# Altium PCB SJA1105Q_LAN8870_EVB_revA.PcbDoc (part 5 of 5)
Units mm, origin at the board's own origin, x right, y up, seen from the top; angles counter-clockwise.
Board outline 128 x 110 mm, 6 copper layers (Top Layer, Mid Layer 1, Mid Layer 2, Mid Layer 3, Mid Layer 4, Bottom Layer), stack 1.538 mm thick; 490 components, 327 nets, 1659 pads, 519 vias.
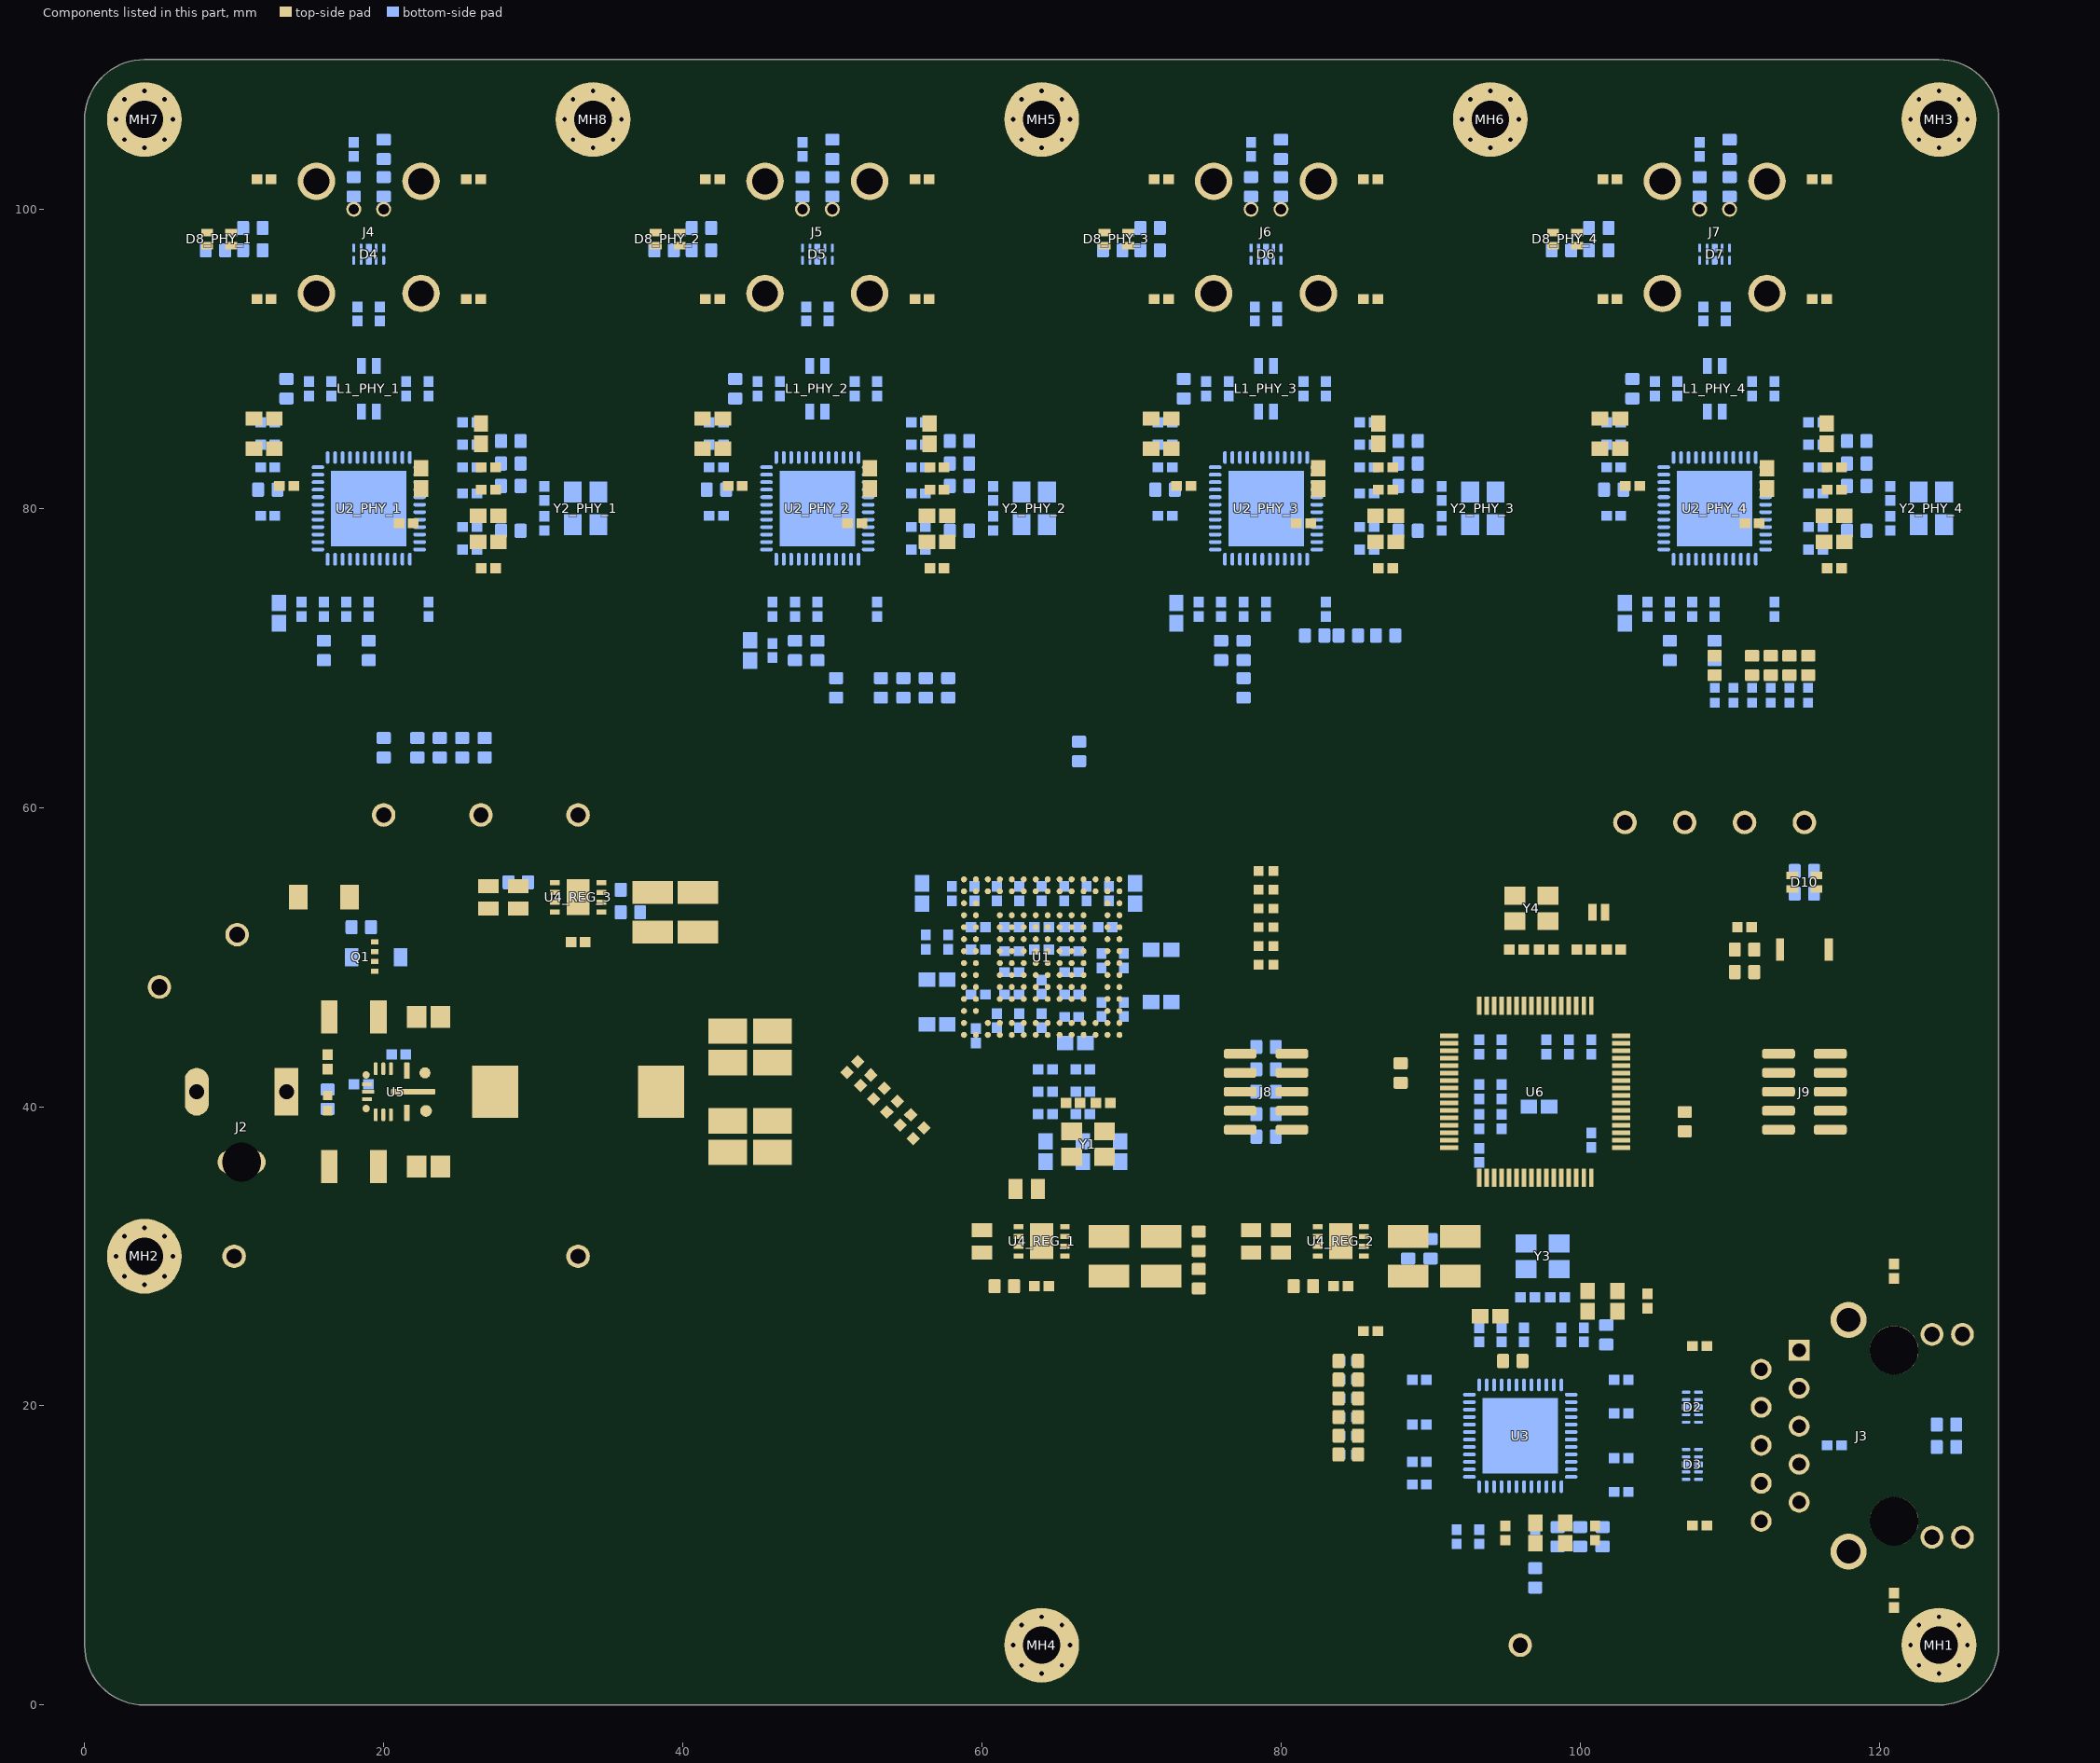
[diagram p9: the components of this part, seen from the top]

## Polygon pours and split planes (outlines as drawn) (continued)
SW_VDDIO_MII2 on Bottom Layer "SW_VDDIO_MII2_L06_P188" (solid, remove dead copper, pour order 188): 61.75,54.25 55.25,54.25 55.25,52.5 59.75,52.5 59.75,51.25 60.75,51.25 60.75,53.25 61.75,53.25
SW_VDD_CORE on Bottom Layer "SW_VDD_CORE_L06_P175" (solid, remove dead copper, pour order 175): 62,48.5 62,52.5 63.25,52.5 63.25,54.25 61.75,54.25 61.75,53.25 60.75,53.25 60.75,48.5
VDDIO_8830 on Bottom Layer "VDDIO_8830_L06_P160" (solid, remove dead copper, pour order 160): 93.5,15 93.5,14 92.5,13 92.5,11.25 91,11.25 91,13 93,15
NetC102_1 on Bottom Layer "NETC102_1_L06_P167" (solid, remove dead copper, pour order 167): 89.25,15.5 91,15.5 92,16.5 93,16.5 93,16 92.5,16 90.5,14 89.25,14
3V3 on Bottom Layer "3V3_L06_P057" (solid, remove dead copper, pour order 57): 57,49.25 57,44.75 53.25,44.75 53.25,49.25
SW_VDDIO_MII3 on Bottom Layer "SW_VDDIO_MII3_L06_P173" (solid, remove dead copper, pour order 173): 67,53 67,52.75 71,52.75 71,54.25 63.25,54.25 63.25,53
3V3 on Bottom Layer "3V3_L06_P058" (solid, remove dead copper, pour order 58): 71,54.25 69.5,54.25 69.5,57 71,57
NetC72_PHY_4_1 on Bottom Layer "NETC72_PHY_4_1_L06_P083" (solid, remove dead copper, pour order 83): 115.75,78 114.75,78 114.25,78.5 112,78.5 112,78 112.75,78 114.25,76.5 115.75,76.5
SW_VDD_CORE on Bottom Layer "SW_VDD_CORE_L06_P228" (solid, remove dead copper, pour order 228): 72,37 72,39 68.25,39 68.25,37
1V2 on Bottom Layer "1V2_L06_P211" (solid, remove dead copper, pour order 211): 63.25,33.25 66,30.5 73.25,30.5 73.25,37 63.25,37
SW_VDDA_OSC on Bottom Layer "SW_VDDA_OSC_L06_P227" (solid, remove dead copper, pour order 227): 65.5,43 66.75,43 66.75,39 67.5,39 67.5,37 65.5,37
SW_VDDA_PLL on Bottom Layer "SW_VDDA_PLL_L06_P222" (solid, remove dead copper, pour order 222): 64.25,43 65.5,43 65.5,37 63.5,37 63.5,39 64.25,39
VDDIO_8830 on Bottom Layer "VDDIO_8830_L06_P168" (solid, remove dead copper, pour order 168): 93,20 91.75,20 91,20.75 89.25,20.75 89.25,22.5 90.25,22.5 92.25,20.5 93,20.5
NetC102_1 on Bottom Layer "NETC102_1_L06_P159" (solid, remove dead copper, pour order 159): 94,15 94,11.25 92.5,11.25 92.5,13 93.5,14 93.5,15
NetC72_PHY_1_1 on Bottom Layer "NETC72_PHY_1_1_L06_P080" (solid, remove dead copper, pour order 80): 25.75,78 24.75,78 24.25,78.5 22,78.5 22,78 22.75,78 24.25,76.5 25.75,76.5
NetC80_PHY_1_1 on Bottom Layer "NETC80_PHY_1_1_L06_P064" (solid, remove dead copper, pour order 64): 15.25,74.5 12.5,74.5 12.5,73.25 16.75,73.25 16.75,74 17.5,74.75 17.5,75.75 17.75,76 17.75,77 17,77 17,76.25
NetC72_PHY_1_1 on Bottom Layer "NETC72_PHY_1_1_L06_P120" (solid, remove dead copper, pour order 120): 16,79.75 14.75,79.75 14.25,80.25 12.25,80.25 12.25,78.75 16,78.75
3V3 on Bottom Layer "3V3_L06_P210" (solid, remove dead copper, pour order 210): 101.25,44 101.25,45.25 97.25,45.25 97.25,44
3V3 on Bottom Layer "3V3_L06_P207" (solid, remove dead copper, pour order 207): 92.75,44 95.25,44 95.25,45.25 92.75,45.25
STM32_VDDA on Bottom Layer "STM32_VDDA_L06_P206" (solid, remove dead copper, pour order 206): 92.75,41 97.25,41 97.25,39 92.75,39
SW_VDDIO_CLO on Bottom Layer "SW_VDDIO_CLO_L06_P189" (solid, remove dead copper, pour order 189): 72,47.75 67.25,47.75 67.25,46.5 72,46.5
NetC80_PHY_4_1 on Bottom Layer "NETC80_PHY_4_1_L06_P067" (solid, remove dead copper, pour order 67): 105.25,74.5 102.5,74.5 102.5,73.25 106.75,73.25 106.75,74 107.5,74.75 107.5,75.75 107.75,76 107.75,77 107,77 107,76.25
NetC72_PHY_3_1 on Bottom Layer "NETC72_PHY_3_1_L06_P150" (solid, remove dead copper, pour order 150): 76,79.75 74.75,79.75 74.25,80.25 72.25,80.25 72.25,78.75 76,78.75
NetC80_PHY_3_1 on Bottom Layer "NETC80_PHY_3_1_L06_P066" (solid, remove dead copper, pour order 66): 75.25,74.5 72.5,74.5 72.5,73.25 76.75,73.25 76.75,74 77.5,74.75 77.5,75.75 77.75,76 77.75,77 77,77 77,76.25
LAN8870_VDDIO_PHY_3 on Bottom Layer "LAN8870_VDDIO_PHY_3_L06_P062" (solid, remove dead copper, pour order 62): 77.5,75.75 77.75,76 77.75,77 78.5,77 78.5,75.75 78.25,75.5 78.25,73.25 76.75,73.25 76.75,74 77.5,74.75
NetC72_PHY_2_1 on Bottom Layer "NETC72_PHY_2_1_L06_P149" (solid, remove dead copper, pour order 149): 46,79.75 44.75,79.75 44.25,80.25 42.25,80.25 42.25,78.75 46,78.75
NetC72_PHY_2_1 on Bottom Layer "NETC72_PHY_2_1_L06_P081" (solid, remove dead copper, pour order 81): 55.75,78 54.75,78 54.25,78.5 52,78.5 52,78 52.75,78 54.25,76.5 55.75,76.5
SW_VDDIO_MII1 on Bottom Layer "SW_VDDIO_MII1_L06_P187" (solid, remove dead copper, pour order 187): 55.5,49.25 57,49.25 57,47.75 58.5,47.75 58.5,48 59.75,48 59.75,46.75 60.75,46.75 60.75,51.25 59.75,51.25 59.75,50 58.5,50 58.5,51 55.5,51
SW_VDD_CORE on Bottom Layer "SW_VDD_CORE_L06_P183" (solid, remove dead copper, pour order 183): 66.25,47 65,47 65,48.75 66,48.75 66,49.75 67.25,49.75 67.25,47.75 66.25,47.75
SW_VDDIO_MII4 on Bottom Layer "SW_VDDIO_MII4_L06_P179" (solid, remove dead copper, pour order 179): 68.25,51.5 72,51.5 72,49.75 67.25,49.75 66,49.75 66,51 67,51 67,52.75 68.25,52.75
SW_VDD_CORE on Bottom Layer "SW_VDD_CORE_L06_P178" (solid, remove dead copper, pour order 178): 65.5,53 67,53 67,51 66,51 66,52.25 65.5,52.25
SW_VDD_CORE on Bottom Layer "SW_VDD_CORE_L06_P176" (solid, remove dead copper, pour order 176): 64,49.75 64,53 65.5,53 65.5,52.25 65.25,52.25 65.25,49.75
SW_VDDIO_HOST on Bottom Layer "SW_VDDIO_HOST_L06_P172" (solid, remove dead copper, pour order 172): 64.25,45.75 64.5,45.75 64.5,43.5 66.25,43.5 66.25,45.5 66,45.5 66,47.25 65.25,47.25 65.25,48 63.25,48 63.25,46.75 64.25,46.75
SW_VDDIO_MII0 on Bottom Layer "SW_VDDIO_MII0_L06_P171" (solid, remove dead copper, pour order 171): 59,46.75 57,46.75 57,44.75 60.25,44.75 60.25,45.75 64.25,45.75 64.25,46.75
NetC109_1 on Bottom Layer "NETC109_1_L06_P155" (solid, remove dead copper, pour order 155): 99,20.5 100.75,20.5 101.25,21 102.75,21 102.75,22.5 100.5,22.5 99,21
NetC112_1 on Bottom Layer "NETC112_1_L06_P153" (solid, remove dead copper, pour order 153): 99,19.75 100.5,19.75 101.25,20.5 102.75,20.5 102.75,18.75 99,18.75
NetC109_1 on Bottom Layer "NETC109_1_L06_P154" (solid, remove dead copper, pour order 154): 99,15.5 100.75,15.5 101.25,15 102.75,15 102.75,13.5 100.5,13.5 99,15
NetC112_1 on Bottom Layer "NETC112_1_L06_P152" (solid, remove dead copper, pour order 152): 99,16.25 100.5,16.25 101.25,15.5 102.75,15.5 102.75,17.25 99,17.25
NetC107_1 on Bottom Layer "NETC107_1_L06_P156" (solid, remove dead copper, pour order 156): 98.75,21 98.75,21.5 101,23.75 101,24.75 98,24.75 98,21
VDDIO_8830 on Bottom Layer "VDDIO_8830_L06_P170" (solid, remove dead copper, pour order 170): 96.25,15 96.25,11.25 97.75,11.25 97.75,13.25 97,14 97,15
NetC102_1 on Bottom Layer "NETC102_1_L06_P161" (solid, remove dead copper, pour order 161): 93,18 89.25,18 89.25,19.5 91,19.5 92,18.5 93,18.5
VDDIO_8830 on Bottom Layer "VDDIO_8830_L06_P162" (solid, remove dead copper, pour order 162): 93,17 89.25,17 89.25,15.5 91,15.5 92,16.5 93,16.5
NetC102_1 on Bottom Layer "NETC102_1_L06_P158" (solid, remove dead copper, pour order 158): 95,21 94.5,21 94.5,21.75 92.75,23.5 92.75,24.75 94,24.75 94,23.5 95,22.5
VDDIO_8830 on Bottom Layer "VDDIO_8830_L06_P157" (solid, remove dead copper, pour order 157): 95.5,21 95.5,24.75 94,24.75 94,23.5 95,22.5 95,21
LAN8870_VDDIO_PHY_4 on Bottom Layer "LAN8870_VDDIO_PHY_4_L06_P063" (solid, remove dead copper, pour order 63): 107.5,75.75 107.75,76 107.75,77 108.5,77 108.5,75.75 108.25,75.5 108.25,73.25 106.75,73.25 106.75,74 107.5,74.75
NetC72_PHY_4_1 on Bottom Layer "NETC72_PHY_4_1_L06_P071" (solid, remove dead copper, pour order 71): 108.25,75.5 108.5,75.75 108.5,77 109,77 109,76.25 109.25,76 109.25,75 109.75,74.5 109.75,73.25 108.25,73.25
LAN8870_VDDIO_PHY_4 on Bottom Layer "LAN8870_VDDIO_PHY_4_L06_P075" (solid, remove dead copper, pour order 75): 113.75,75.25 112,77 111.5,77 111.5,76 112.25,75.25 112.25,73.25 113.75,73.25
NetC70_PHY_4_1 on Bottom Layer "NETC70_PHY_4_1_L06_P079" (solid, remove dead copper, pour order 79): 112,79 112.5,79 113,79.5 115.75,79.5 115.75,78 114.75,78 114.25,78.5 112,78.5
NetC76_PHY_4_1 on Bottom Layer "NETC76_PHY_4_1_L06_P087" (solid, remove dead copper, pour order 87): 112,81 112.75,81 113.5,81.75 115.75,81.75 115.75,80.25 112,80.25
LAN8870_VBAT_PHY_4 on Bottom Layer "LAN8870_VBAT_PHY_4_L06_P091" (solid, remove dead copper, pour order 91): 112,82.75 112.75,83.5 115.75,83.5 115.75,82 112,82
LAN8870_VDDA_PHY_4 on Bottom Layer "LAN8870_VDDA_PHY_4_L06_P095" (solid, remove dead copper, pour order 95): 112.25,83 112.75,83.5 115.75,83.5 115.75,85 112.5,85 111.5,84 111.5,83
NetC76_PHY_4_1 on Bottom Layer "NETC76_PHY_4_1_L06_P099" (solid, remove dead copper, pour order 99): 113.25,86 113.75,86.5 115.75,86.5 115.75,85 112.5,85 111,83.5 111,83 110.5,83 110.5,84 112.5,86
LAN8870_VDDA_PHY_4 on Bottom Layer "LAN8870_VDDA_PHY_4_L06_P103" (solid, remove dead copper, pour order 103): 113.75,86.5 113.25,86 112.5,86 110.5,84 110.5,83 110,83 110,84.5 112.25,86.75 112.25,88 113.75,88
NetC76_PHY_4_1 on Bottom Layer "NETC76_PHY_4_1_L06_P107" (solid, remove dead copper, pour order 107): 110,83 110,84.5 112.25,86.75 112.25,88 110.75,88 110.75,86.25 109.5,85 109.5,83
LAN8870_VDDA_PHY_4 on Bottom Layer "LAN8870_VDDA_PHY_4_L06_P111" (solid, remove dead copper, pour order 111): 106,83.5 102.25,83.5 102.25,86.5 104,86.5 106.5,84 106.5,83 106,83
LAN8870_VDDIO_PHY_4 on Bottom Layer "LAN8870_VDDIO_PHY_4_L06_P115" (solid, remove dead copper, pour order 115): 102.25,83.5 106,83.5 106,82 102.25,82
LAN8870_VDDA_PHY_4 on Bottom Layer "LAN8870_VDDA_PHY_4_L06_P119" (solid, remove dead copper, pour order 119): 108,83 108,84 105.75,86.25 105.75,88 107.25,88 107.25,86.25 108.5,85 108.5,83
NetC72_PHY_4_1 on Bottom Layer "NETC72_PHY_4_1_L06_P151" (solid, remove dead copper, pour order 151): 106,79.75 104.75,79.75 104.25,80.25 102.25,80.25 102.25,78.75 106,78.75
LAN8870_VDDIO_PHY_2 on Bottom Layer "LAN8870_VDDIO_PHY_2_L06_P061" (solid, remove dead copper, pour order 61): 47.5,75.75 47.75,76 47.75,77 48.5,77 48.5,75.75 48.25,75.5 48.25,73.25 46.75,73.25 46.75,74 47.5,74.75
LAN8870_VDDIO_PHY_1 on Bottom Layer "LAN8870_VDDIO_PHY_1_L06_P060" (solid, remove dead copper, pour order 60): 17.5,75.75 17.75,76 17.75,77 18.5,77 18.5,75.75 18.25,75.5 18.25,73.25 16.75,73.25 16.75,74 17.5,74.75
NetC80_PHY_2_1 on Bottom Layer "NETC80_PHY_2_1_L06_P065" (solid, remove dead copper, pour order 65): 43.75,73 43.75,70.5 46.75,70.5 46.75,74 47.5,74.75 47.5,75.75 47.75,76 47.75,77 47,77 47,76.25
NetC72_PHY_3_1 on Bottom Layer "NETC72_PHY_3_1_L06_P070" (solid, remove dead copper, pour order 70): 78.25,75.5 78.5,75.75 78.5,77 79,77 79,76.25 79.25,76 79.25,75 79.75,74.5 79.75,73.25 78.25,73.25
NetC72_PHY_2_1 on Bottom Layer "NETC72_PHY_2_1_L06_P069" (solid, remove dead copper, pour order 69): 48.25,75.5 48.5,75.75 48.5,77 49,77 49,76.25 49.25,76 49.25,75 49.75,74.5 49.75,73.25 48.25,73.25
NetC72_PHY_1_1 on Bottom Layer "NETC72_PHY_1_1_L06_P068" (solid, remove dead copper, pour order 68): 18.25,75.5 18.5,75.75 18.5,77 19,77 19,76.25 19.25,76 19.25,75 19.75,74.5 19.75,73.25 18.25,73.25
LAN8870_VDDIO_PHY_3 on Bottom Layer "LAN8870_VDDIO_PHY_3_L06_P074" (solid, remove dead copper, pour order 74): 83.75,75.25 82,77 81.5,77 81.5,76 82.25,75.25 82.25,73.25 83.75,73.25
LAN8870_VDDIO_PHY_2 on Bottom Layer "LAN8870_VDDIO_PHY_2_L06_P073" (solid, remove dead copper, pour order 73): 53.75,75.25 52,77 51.5,77 51.5,76 52.25,75.25 52.25,73.25 53.75,73.25
LAN8870_VDDIO_PHY_1 on Bottom Layer "LAN8870_VDDIO_PHY_1_L06_P072" (solid, remove dead copper, pour order 72): 23.75,75.25 22,77 21.5,77 21.5,76 22.25,75.25 22.25,73.25 23.75,73.25
NetC70_PHY_3_1 on Bottom Layer "NETC70_PHY_3_1_L06_P078" (solid, remove dead copper, pour order 78): 82,79 82.5,79 83,79.5 85.75,79.5 85.75,78 84.75,78 84.25,78.5 82,78.5
NetC70_PHY_2_1 on Bottom Layer "NETC70_PHY_2_1_L06_P077" (solid, remove dead copper, pour order 77): 52,79 52.5,79 53,79.5 55.75,79.5 55.75,78 54.75,78 54.25,78.5 52,78.5
NetC70_PHY_1_1 on Bottom Layer "NETC70_PHY_1_1_L06_P076" (solid, remove dead copper, pour order 76): 22,79 22.5,79 23,79.5 25.75,79.5 25.75,78 24.75,78 24.25,78.5 22,78.5
NetC72_PHY_3_1 on Bottom Layer "NETC72_PHY_3_1_L06_P082" (solid, remove dead copper, pour order 82): 85.75,78 84.75,78 84.25,78.5 82,78.5 82,78 82.75,78 84.25,76.5 85.75,76.5
NetC76_PHY_3_1 on Bottom Layer "NETC76_PHY_3_1_L06_P086" (solid, remove dead copper, pour order 86): 82,81 82.75,81 83.5,81.75 85.75,81.75 85.75,80.25 82,80.25
NetC76_PHY_2_1 on Bottom Layer "NETC76_PHY_2_1_L06_P085" (solid, remove dead copper, pour order 85): 52,81 52.75,81 53.5,81.75 55.75,81.75 55.75,80.25 52,80.25
NetC76_PHY_1_1 on Bottom Layer "NETC76_PHY_1_1_L06_P084" (solid, remove dead copper, pour order 84): 22,81 22.75,81 23.5,81.75 25.75,81.75 25.75,80.25 22,80.25
LAN8870_VBAT_PHY_3 on Bottom Layer "LAN8870_VBAT_PHY_3_L06_P090" (solid, remove dead copper, pour order 90): 82,82.75 82.75,83.5 85.75,83.5 85.75,82 82,82
LAN8870_VBAT_PHY_2 on Bottom Layer "LAN8870_VBAT_PHY_2_L06_P089" (solid, remove dead copper, pour order 89): 52,82.75 52.75,83.5 55.75,83.5 55.75,82 52,82
LAN8870_VBAT_PHY_1 on Bottom Layer "LAN8870_VBAT_PHY_1_L06_P088" (solid, remove dead copper, pour order 88): 22,82.75 22.75,83.5 25.75,83.5 25.75,82 22,82
LAN8870_VDDA_PHY_3 on Bottom Layer "LAN8870_VDDA_PHY_3_L06_P094" (solid, remove dead copper, pour order 94): 82.25,83 82.75,83.5 85.75,83.5 85.75,85 82.5,85 81.5,84 81.5,83
LAN8870_VDDA_PHY_2 on Bottom Layer "LAN8870_VDDA_PHY_2_L06_P093" (solid, remove dead copper, pour order 93): 52.25,83 52.75,83.5 55.75,83.5 55.75,85 52.5,85 51.5,84 51.5,83
LAN8870_VDDA_PHY_1 on Bottom Layer "LAN8870_VDDA_PHY_1_L06_P092" (solid, remove dead copper, pour order 92): 22.25,83 22.75,83.5 25.75,83.5 25.75,85 22.5,85 21.5,84 21.5,83
NetC76_PHY_3_1 on Bottom Layer "NETC76_PHY_3_1_L06_P098" (solid, remove dead copper, pour order 98): 83.25,86 83.75,86.5 85.75,86.5 85.75,85 82.5,85 81,83.5 81,83 80.5,83 80.5,84 82.5,86
NetC76_PHY_2_1 on Bottom Layer "NETC76_PHY_2_1_L06_P097" (solid, remove dead copper, pour order 97): 53.25,86 53.75,86.5 55.75,86.5 55.75,85 52.5,85 51,83.5 51,83 50.5,83 50.5,84 52.5,86
NetC76_PHY_1_1 on Bottom Layer "NETC76_PHY_1_1_L06_P096" (solid, remove dead copper, pour order 96): 23.25,86 23.75,86.5 25.75,86.5 25.75,85 22.5,85 21,83.5 21,83 20.5,83 20.5,84 22.5,86
LAN8870_VDDA_PHY_3 on Bottom Layer "LAN8870_VDDA_PHY_3_L06_P102" (solid, remove dead copper, pour order 102): 83.75,86.5 83.25,86 82.5,86 80.5,84 80.5,83 80,83 80,84.5 82.25,86.75 82.25,88 83.75,88
LAN8870_VDDA_PHY_2 on Bottom Layer "LAN8870_VDDA_PHY_2_L06_P101" (solid, remove dead copper, pour order 101): 53.75,86.5 53.25,86 52.5,86 50.5,84 50.5,83 50,83 50,84.5 52.25,86.75 52.25,88 53.75,88
LAN8870_VDDA_PHY_1 on Bottom Layer "LAN8870_VDDA_PHY_1_L06_P100" (solid, remove dead copper, pour order 100): 23.75,86.5 23.25,86 22.5,86 20.5,84 20.5,83 20,83 20,84.5 22.25,86.75 22.25,88 23.75,88
NetC76_PHY_3_1 on Bottom Layer "NETC76_PHY_3_1_L06_P106" (solid, remove dead copper, pour order 106): 80,83 80,84.5 82.25,86.75 82.25,88 80.75,88 80.75,86.25 79.5,85 79.5,83
NetC76_PHY_2_1 on Bottom Layer "NETC76_PHY_2_1_L06_P105" (solid, remove dead copper, pour order 105): 50,83 50,84.5 52.25,86.75 52.25,88 50.75,88 50.75,86.25 49.5,85 49.5,83
NetC76_PHY_1_1 on Bottom Layer "NETC76_PHY_1_1_L06_P104" (solid, remove dead copper, pour order 104): 20,83 20,84.5 22.25,86.75 22.25,88 20.75,88 20.75,86.25 19.5,85 19.5,83
LAN8870_VDDA_PHY_3 on Bottom Layer "LAN8870_VDDA_PHY_3_L06_P110" (solid, remove dead copper, pour order 110): 76,83.5 72.25,83.5 72.25,86.5 74,86.5 76.5,84 76.5,83 76,83
LAN8870_VDDA_PHY_2 on Bottom Layer "LAN8870_VDDA_PHY_2_L06_P109" (solid, remove dead copper, pour order 109): 46,83.5 42.25,83.5 42.25,86.5 44,86.5 46.5,84 46.5,83 46,83
LAN8870_VDDA_PHY_1 on Bottom Layer "LAN8870_VDDA_PHY_1_L06_P108" (solid, remove dead copper, pour order 108): 16,83.5 12.25,83.5 12.25,86.5 14,86.5 16.5,84 16.5,83 16,83
LAN8870_VDDIO_PHY_3 on Bottom Layer "LAN8870_VDDIO_PHY_3_L06_P114" (solid, remove dead copper, pour order 114): 72.25,83.5 76,83.5 76,82 72.25,82
LAN8870_VDDIO_PHY_2 on Bottom Layer "LAN8870_VDDIO_PHY_2_L06_P113" (solid, remove dead copper, pour order 113): 42.25,83.5 46,83.5 46,82 42.25,82
LAN8870_VDDIO_PHY_1 on Bottom Layer "LAN8870_VDDIO_PHY_1_L06_P112" (solid, remove dead copper, pour order 112): 12.25,83.5 16,83.5 16,82 12.25,82
LAN8870_VDDA_PHY_3 on Bottom Layer "LAN8870_VDDA_PHY_3_L06_P118" (solid, remove dead copper, pour order 118): 78,83 78,84 75.75,86.25 75.75,88 77.25,88 77.25,86.25 78.5,85 78.5,83
LAN8870_VDDA_PHY_2 on Bottom Layer "LAN8870_VDDA_PHY_2_L06_P117" (solid, remove dead copper, pour order 117): 48,83 48,84 45.75,86.25 45.75,88 47.25,88 47.25,86.25 48.5,85 48.5,83
LAN8870_VDDA_PHY_1 on Bottom Layer "LAN8870_VDDA_PHY_1_L06_P116" (solid, remove dead copper, pour order 116): 18,83 18,84 15.75,86.25 15.75,88 17.25,88 17.25,86.25 18.5,85 18.5,83
GND on Top Layer "GND_L01_P242" (solid, remove dead copper, pour order 242): 0,4 0,106 cw(c4,106) 4,110 124,110 cw(c124,106) 128,106 128,4 cw(c124,4) 124,0 4,0 cw(c4,4)
3V3 on Top Layer "3V3_L01_P239" (solid, remove dead copper, pour order 239): 83,31 77,31 77,33.5 83,33.5
8830_1V1 on Top Layer "8830_1V1_L01_P237" (solid, remove dead copper, pour order 237): 85,31.5 85.75,31.5 87.75,29.5 94,29.5 94,33.5 85,33.5
NetC102_1 on Top Layer "NETC102_1_L01_P186" (solid, remove dead copper, pour order 186): 94,23.5 94,27 86,27 86,9.5 94,9.5 94,12.5 92.5,12.5 92.5,11.5 91,11.5 91,15.5 89.5,15.5 89.5,18 90.5,18 90.5,19.5 89.5,19.5 89.5,23.5
1V2 on Top Layer "1V2_L01_P238" (solid, remove dead copper, pour order 238): 65,31.5 66,31.5 67,30.5 75,30.5 75,33.5 65,33.5
3V3 on Top Layer "3V3_L01_P214" (solid, remove dead copper, pour order 214): 58.5,33.5 60.5,35.5 63,35.5 63,31 58.5,31
8830_1V1 on Top Layer "8830_1V1_L01_P204" (solid, remove dead copper, pour order 204): 94,24.5 99.5,24.5 99.5,27 103.5,27 103.5,33.5 94,33.5
RJ45_GND on Top Layer "RJ45_GND_L01_P121" (solid, remove dead copper, pour order 121): 128,8 109,8 109,28 128,28
P4_GND on Top Layer "P4_GND_L01_P124" (solid, remove dead copper, pour order 124): 103,110 103,92 115,92 115,110
P3_GND on Top Layer "P3_GND_L01_P123" (solid, remove dead copper, pour order 123): 73,110 73,92 85,92 85,110
P2_GND on Top Layer "P2_GND_L01_P122" (solid, remove dead copper, pour order 122): 43,110 43,92 55,92 55,110
P1_GND on Top Layer "P1_GND_L01_P125" (solid, remove dead copper, pour order 125): 13,110 13,92 25,92 25,110
3V3 on Top Layer "3V3_L01_P126" (solid, remove dead copper, pour order 126): 99.75,11.5 99.75,9 97.75,9 97.75,10 96.25,10 96.25,11.5
3V3 on Top Layer "3V3_L01_P235" (solid, remove dead copper, pour order 235): 115.5,85 115.5,87.5 102,87.5 102,83.25 99,83.25 99,89.5 117.5,89.5 117.5,85
3V3 on Top Layer "3V3_L01_P234" (solid, remove dead copper, pour order 234): 85.5,85 85.5,87.5 72,87.5 72,83.25 69,83.25 69,89.5 87.5,89.5 87.5,85
3V3 on Top Layer "3V3_L01_P127" (solid, remove dead copper, pour order 127): 55.5,85 55.5,87.5 42,87.5 42,83.25 39,83.25 39,89.5 57.5,89.5 57.5,85
3V3 on Top Layer "3V3_L01_P209" (solid, remove dead copper, pour order 209): 32,54 26,54 26,55.5 32,55.5
VCC on Top Layer "VCC_L01_P230" (solid, remove dead copper, pour order 230): 20.25,40.25 20.25,38.75 19,38.75 19,34.75 23,34.75 23,38.75 22.25,38.75 22.25,40.25
LM61495Q3_VCC on Top Layer "LM61495Q3_VCC_L01_P233" (solid, remove dead copper, pour order 233): 19.25,40.75 18.25,40.75 17.75,41.25 17.75,41.75 19.25,41.75 19.25,43 15.75,43 15.75,40.25 19.25,40.25
VCC on Top Layer "VCC_L01_P232" (solid, remove dead copper, pour order 232): 20.75,41.75 20.75,43.25 19,43.25 19,50.75 23,50.75 23,43.25 22.25,43.25 22.25,41.75
SW_VDDA_OSC on Top Layer "SW_VDDA_OSC_L01_P226" (solid, remove dead copper, pour order 226): 65.5,45.25 66.25,45.25 66.5,45 66.5,42.25 65.5,42.25
SW_VDDA_PLL on Top Layer "SW_VDDA_PLL_L01_P225" (solid, remove dead copper, pour order 225): 65.5,45.25 64.75,45.25 64.75,44.75 64.5,44.5 64.5,42.25 65.5,42.25
8870_1V1 on Top Layer "8870_1V1_L01_P224" (solid, remove dead copper, pour order 224): 117,80.5 117,76.75 119.5,76.75 119.5,80.5
8870_1V1 on Top Layer "8870_1V1_L01_P219" (solid, remove dead copper, pour order 219): 87,80.5 87,76.75 89.5,76.75 89.5,80.5
8870_1V1 on Top Layer "8870_1V1_L01_P216" (solid, remove dead copper, pour order 216): 57,80.5 57,76.75 59.5,76.75 59.5,80.5
8870_1V1 on Top Layer "8870_1V1_L01_P213" (solid, remove dead copper, pour order 213): 27,80.5 27,76.75 29.5,76.75 29.5,80.5
8870_1V1 on Top Layer "8870_1V1_L01_P212" (solid, remove dead copper, pour order 212): 34,54.5 35,54.5 36.5,53 42.5,53 42.5,55.5 34,55.5
NetC107_1 on Top Layer "NETC107_1_L01_P208" (solid, remove dead copper, pour order 208): 101.5,27 99.5,27 99.5,22.5 101.5,22.5
NetC120_2 on Top Layer "NETC120_2_L01_P202" (solid, remove dead copper, pour order 202): 20.5,41.75 20.5,40.25 23.5,40.25 23.5,39 29.25,39 29.25,43 23.5,43 23.5,41.75
3V3 on Top Layer "3V3_L01_P201" (solid, remove dead copper, pour order 201): 47.5,44 36.75,44 36.75,38 47.5,38
NetF1_2 on Top Layer "NETF1_2_L01_P200" (solid, remove dead copper, pour order 200): 15,55.25 19,55.25 19,48.25 15,48.25
NetF1_1 on Top Layer "NETF1_1_L01_P199" (solid, remove dead copper, pour order 199): 15,55.25 15,39.25 9,39.25 9,55.25
NetC72_PHY_1_1 on Top Layer "NETC72_PHY_1_1_L01_P140" (solid, remove dead copper, pour order 140): 18.75,73.5 16.75,75.5 12.5,75.5 12.5,79.75 16.5,79.75 16.5,77.5 21.5,77.5 21.5,78.25 27,78.25 27,75.5 21.25,75.5 19.25,73.5
3V3 on Top Layer "3V3_L01_P198" (solid, remove dead copper, pour order 198): 100.5,34.5 100.5,37.5 101,37.5 101,34.5
3V3 on Top Layer "3V3_L01_P197" (solid, remove dead copper, pour order 197): 90.5,37.5 93.75,37.5 93.75,37 90.5,37
3V3 on Top Layer "3V3_L01_P196" (solid, remove dead copper, pour order 196): 100.5,47.5 100.5,46 99,46 99,44.5 103.5,44.5 103.5,45 101,47.5
3V3 on Top Layer "3V3_L01_P195" (solid, remove dead copper, pour order 195): 93.5,47.5 93.5,44.5 93,44.5 93,47.5
STM32_VDDA on Top Layer "STM32_VDDA_L01_P194" (solid, remove dead copper, pour order 194): 90.5,39.5 92,39.5 92,41 93.75,41 93.75,39 92.75,39 92.75,38.5 90.5,38.5
LAN8870_VDDIO_PHY_3 on Top Layer "LAN8870_VDDIO_PHY_3_L01_P148" (solid, remove dead copper, pour order 148): 72,83.25 72,84.75 73.5,84.75 73.5,79.75 72.5,79.75 72.5,75.5 76.75,75.5 78.75,73.5 79.25,73.5 81.25,75.5 83.5,75.5 83.5,73.75 81,71.25 77,71.25 75.25,73 70.5,73 70.5,83.25
NetC72_PHY_3_1 on Top Layer "NETC72_PHY_3_1_L01_P142" (solid, remove dead copper, pour order 142): 78.75,73.5 76.75,75.5 72.5,75.5 72.5,79.75 76.5,79.75 76.5,77.5 81.5,77.5 81.5,78.25 87,78.25 87,75.5 81.25,75.5 79.25,73.5
SW_VDDIO_MII4 on Top Layer "SW_VDDIO_MII4_L01_P193" (solid, remove dead copper, pour order 193): 66.5,53 66.5,51.75 67.75,51.75 67.75,52.25 67,53
SW_VDDIO_MII2 on Top Layer "SW_VDDIO_MII2_L01_P192" (solid, remove dead copper, pour order 192): 61.5,52.5 62.25,52.5 62.25,53.75 60.75,53.75 60.25,53.25 60.25,51.75 61.5,51.75
NetC112_1 on Top Layer "NETC112_1_L01_P191" (solid, remove dead copper, pour order 191): 102.5,21 102.5,22.5 101.5,22.5 101.5,27 105.5,27 105.5,15 101.5,15 101.5,21
NetC109_1 on Top Layer "NETC109_1_L01_P190" (solid, remove dead copper, pour order 190): 102.5,11.5 98.5,11.5 98.5,22.5 102.5,22.5 102.5,21 101.5,21 101.5,15 102.5,15
VDDIO_8830 on Top Layer "VDDIO_8830_L01_P185" (solid, remove dead copper, pour order 185): 89.5,19.5 90.5,19.5 90.5,18 89.5,18 89.5,15.5 91,15.5 91,11.5 92.5,11.5 92.5,12.5 94,12.5 94,11.5 97.75,11.5 97.75,15.5 93.5,15.5 93.5,20.5 95.5,20.5 95.5,24.5 94,24.5 94,23.5 89.5,23.5
LAN8870_VDDA_PHY_4 on Top Layer "LAN8870_VDDA_PHY_4_L01_P131" (solid, remove dead copper, pour order 131): 103.5,83.5 103.5,84.75 102,84.75 102,87.5 111,87.5 111,85.5 113.5,85.5 113.5,82 111.5,82 111.5,83.5
NetC76_PHY_4_1 on Top Layer "NETC76_PHY_4_1_L01_P135" (solid, remove dead copper, pour order 135): 117,78.25 115.5,78.25 115.5,80.5 113.5,80.5 113.5,85.5 111,85.5 111,87.5 115.5,87.5 115.5,83.25 114.75,83.25 114.75,82.25 117,82.25
NetC70_PHY_4_1 on Top Layer "NETC70_PHY_4_1_L01_P139" (solid, remove dead copper, pour order 139): 113.5,80.5 113.5,82 111.5,82 111.5,78.25 115.5,78.25 115.5,80.5
NetC72_PHY_4_1 on Top Layer "NETC72_PHY_4_1_L01_P143" (solid, remove dead copper, pour order 143): 108.75,73.5 106.75,75.5 102.5,75.5 102.5,79.75 106.5,79.75 106.5,77.5 111.5,77.5 111.5,78.25 117,78.25 117,75.5 111.25,75.5 109.25,73.5
LAN8870_VDDIO_PHY_4 on Top Layer "LAN8870_VDDIO_PHY_4_L01_P164" (solid, remove dead copper, pour order 164): 102,83.25 102,84.75 103.5,84.75 103.5,79.75 102.5,79.75 102.5,75.5 106.75,75.5 108.75,73.5 109.25,73.5 111.25,75.5 113.5,75.5 113.5,73.75 111,71.25 107,71.25 105.25,73 100.5,73 100.5,83.25
LAN8870_VBAT_PHY_4 on Top Layer "LAN8870_VBAT_PHY_4_L01_P174" (solid, remove dead copper, pour order 174): 114.75,83.25 115.5,83.25 115.5,85 117.5,85 117.5,82.25 114.75,82.25
LAN8870_VDDA_PHY_3 on Top Layer "LAN8870_VDDA_PHY_3_L01_P130" (solid, remove dead copper, pour order 130): 73.5,83.5 73.5,84.75 72,84.75 72,87.5 81,87.5 81,85.5 83.5,85.5 83.5,82 81.5,82 81.5,83.5
LAN8870_VDDA_PHY_2 on Top Layer "LAN8870_VDDA_PHY_2_L01_P129" (solid, remove dead copper, pour order 129): 43.5,83.5 43.5,84.75 42,84.75 42,87.5 51,87.5 51,85.5 53.5,85.5 53.5,82 51.5,82 51.5,83.5
LAN8870_VDDA_PHY_1 on Top Layer "LAN8870_VDDA_PHY_1_L01_P128" (solid, remove dead copper, pour order 128): 13.5,83.5 13.5,84.75 12,84.75 12,87.5 21,87.5 21,85.5 23.5,85.5 23.5,82 21.5,82 21.5,83.5
NetC76_PHY_3_1 on Top Layer "NETC76_PHY_3_1_L01_P134" (solid, remove dead copper, pour order 134): 87,78.25 85.5,78.25 85.5,80.5 83.5,80.5 83.5,85.5 81,85.5 81,87.5 85.5,87.5 85.5,83.25 84.75,83.25 84.75,82.25 87,82.25
NetC76_PHY_2_1 on Top Layer "NETC76_PHY_2_1_L01_P133" (solid, remove dead copper, pour order 133): 57,78.25 55.5,78.25 55.5,80.5 53.5,80.5 53.5,85.5 51,85.5 51,87.5 55.5,87.5 55.5,83.25 54.75,83.25 54.75,82.25 57,82.25
NetC76_PHY_1_1 on Top Layer "NETC76_PHY_1_1_L01_P132" (solid, remove dead copper, pour order 132): 27,78.25 25.5,78.25 25.5,80.5 23.5,80.5 23.5,85.5 21,85.5 21,87.5 25.5,87.5 25.5,83.25 24.75,83.25 24.75,82.25 27,82.25
NetC70_PHY_3_1 on Top Layer "NETC70_PHY_3_1_L01_P138" (solid, remove dead copper, pour order 138): 83.5,80.5 83.5,82 81.5,82 81.5,78.25 85.5,78.25 85.5,80.5
NetC70_PHY_2_1 on Top Layer "NETC70_PHY_2_1_L01_P137" (solid, remove dead copper, pour order 137): 53.5,80.5 53.5,82 51.5,82 51.5,78.25 55.5,78.25 55.5,80.5
NetC70_PHY_1_1 on Top Layer "NETC70_PHY_1_1_L01_P136" (solid, remove dead copper, pour order 136): 23.5,80.5 23.5,82 21.5,82 21.5,78.25 25.5,78.25 25.5,80.5
NetC72_PHY_2_1 on Top Layer "NETC72_PHY_2_1_L01_P141" (solid, remove dead copper, pour order 141): 48.75,73.5 46.75,75.5 42.5,75.5 42.5,79.75 46.5,79.75 46.5,77.5 51.5,77.5 51.5,78.25 57,78.25 57,75.5 51.25,75.5 49.25,73.5
LAN8870_VDDIO_PHY_2 on Top Layer "LAN8870_VDDIO_PHY_2_L01_P145" (solid, remove dead copper, pour order 145): 42,83.25 42,84.75 43.5,84.75 43.5,79.75 42.5,79.75 42.5,75.5 46.75,75.5 48.75,73.5 49.25,73.5 51.25,75.5 53.5,75.5 53.5,73.75 51,71.25 47,71.25 45.25,73 40.5,73 40.5,83.25
LAN8870_VDDIO_PHY_1 on Top Layer "LAN8870_VDDIO_PHY_1_L01_P144" (solid, remove dead copper, pour order 144): 12,83.25 12,84.75 13.5,84.75 13.5,79.75 12.5,79.75 12.5,75.5 16.75,75.5 18.75,73.5 19.25,73.5 21.25,75.5 23.5,75.5 23.5,73.75 21,71.25 17,71.25 15.25,73 10.5,73 10.5,83.25
LAN8870_VBAT_PHY_3 on Top Layer "LAN8870_VBAT_PHY_3_L01_P169" (solid, remove dead copper, pour order 169): 84.75,83.25 85.5,83.25 85.5,85 87.5,85 87.5,82.25 84.75,82.25
LAN8870_VBAT_PHY_2 on Top Layer "LAN8870_VBAT_PHY_2_L01_P166" (solid, remove dead copper, pour order 166): 54.75,83.25 55.5,83.25 55.5,85 57.5,85 57.5,82.25 54.75,82.25
LAN8870_VBAT_PHY_1 on Top Layer "LAN8870_VBAT_PHY_1_L01_P165" (solid, remove dead copper, pour order 165): 24.75,83.25 25.5,83.25 25.5,85 27.5,85 27.5,82.25 24.75,82.25
3V3 on Top Layer "3V3_L01_P184" (solid, remove dead copper, pour order 184): 25.5,85 25.5,87.5 12,87.5 12,83.25 9,83.25 9,89.5 27.5,89.5 27.5,85
SW_VDD_CORE on Mid Layer 2 "SW_VDD_CORE_L03_P215" (solid, remove dead copper, pour order 215): 72.25,36.75 72.25,56 58,56 58,36.75
GND on Mid Layer 2 "GND_L03_P240" (solid, remove dead copper, pour order 240): 0,4 0,106 cw(c4,106) 4,110 124,110 cw(c124,106) 128,106 128,4 cw(c124,4) 124,0 4,0 cw(c4,4)
8870_1V1 on Mid Layer 2 "8870_1V1_L03_P205" (solid, remove dead copper, pour order 205): 12,53 42.5,53 49.5,60 120,60 120,78 12,78
3V3 on Mid Layer 3 "3V3_L04_P245" (solid, remove dead copper, pour order 245): 0,4 0,106 cw(c4,106) 4,110 124,110 cw(c124,106) 128,106 128,4 cw(c124,4) 124,0 4,0 cw(c4,4)
VCC on Mid Layer 3 "VCC_L04_P220" (solid, remove dead copper, pour order 220): 18,48 24,48 24,34 18,34
GND on Mid Layer 1 "GND_L02_P241" (solid, remove dead copper, pour order 241): 0,4 0,106 cw(c4,106) 4,110 124,110 cw(c124,106) 128,106 128,4 cw(c124,4) 124,0 4,0 cw(c4,4)
GND on Mid Layer 4 "GND_L05_P244" (solid, remove dead copper, pour order 244): 0,4 0,106 cw(c4,106) 4,110 124,110 cw(c124,106) 128,106 128,4 cw(c124,4) 124,0 4,0 cw(c4,4)

## Other copper
Top Layer:
  pour cut-out: 53.25,66.75 53.5,66.75 53.75,67 54,66.75 53.75,66.5 53.5,66.5
  pour cut-out: 128,8 128,7 108,7 108,29 128,29 128,28 109,28 109,8
  pour cut-out: 103,110 102,110 102,91 116,91 116,110 115,110 115,92 103,92
  pour cut-out: 73,110 72,110 72,91 86,91 86,110 85,110 85,92 73,92
  pour cut-out: 43,110 42,110 42,91 56,91 56,110 55,110 55,92 43,92
  pour cut-out: 13,110 12,110 12,91 26,91 26,110 25,110 25,92 13,92
Mid Layer 1:
  pour cut-out: 12,110 26,110 26,91 12,91

## Silkscreen, mask and mechanical layers (free items; w line width, h text height)
Top Overlay:
  drawing of 12 lines, arcs and shapes, not listed
  text "P1" at 7.5,104.501 h3
  text "P2" at 37.5,104.501 h3
  text "P3" at 67.5,104.501 h3
  text "P4" at 97.5,104.501 h3
  text "GR: LNK" at 6.563,99.65 h0.75
  text "GR: LNK" at 36.563,99.65 h0.75
  text "GR: LNK" at 66.563,99.65 h0.75
  text "GR: LNK" at 96.563,99.65 h0.75
  text "RD: ERR" at 6.563,95.6 h0.75
  text "RD: ERR" at 36.563,95.6 h0.75
  text "RD: ERR" at 66.563,95.6 h0.75
  text "RD: ERR" at 96.563,95.6 h0.75
  text "MOSI" at 101.75,60.65 h0.75
  text "MISO" at 105.688,60.65 h0.75
  text "SCLK" at 109.625,60.65 h0.75
  text "nCS" at 114,60.65 h0.75
  text "VCC" at 22.15,59.125 h0.75
  text "MAIN / 3V3" at 28.5,58.345 h0.75
  text "8870 / 1V1" at 35,58.345 h0.75
  text "15V MAX" at 0.751,56.254 h1
  text "STM32 / STAT" at 118.5,53.421 h1
  text "+" at 13.492,50.738 h1.52
  text "STM32 / RST" at 118.5,48.921 h1
  text "-" at 13.492,47.238 h1.52
  text "STM32 / SWD" at 118.5,44.421 h1
  text "SJA1105 / JTAG" at 82.5,44.171 h1
  text "GND" at 12.15,29.625 h0.75
  text "SJA1105 / 1V2" at 35,28.845 h0.75
  text "SJA1105Q_EVB" at 4,19.5 h6
  text "Project:" at 4.1,14.1 h3
  text "BRZ" at 30,14 h3
  text "Revision:" at 4.1,9.1 h3
  text "A" at 30,9 h3
  text "Date:" at 4.1,4.1 h3
  text "01/02/2026" at 30,4 h3
  text "8830 / 1V1" at 98,2.845 h0.75
Mechanical 1:
  the board outline again, w0.15